# Altium PCB nogyr.PcbDoc
Units mil, origin at the board's own origin, x right, y up, seen from the top; angles counter-clockwise.
Board outline 2449.82 x 1510.05 mil, 2 copper layers (Top Layer, Bottom Layer); 30 components, 62 nets, 140 pads, 42 vias.
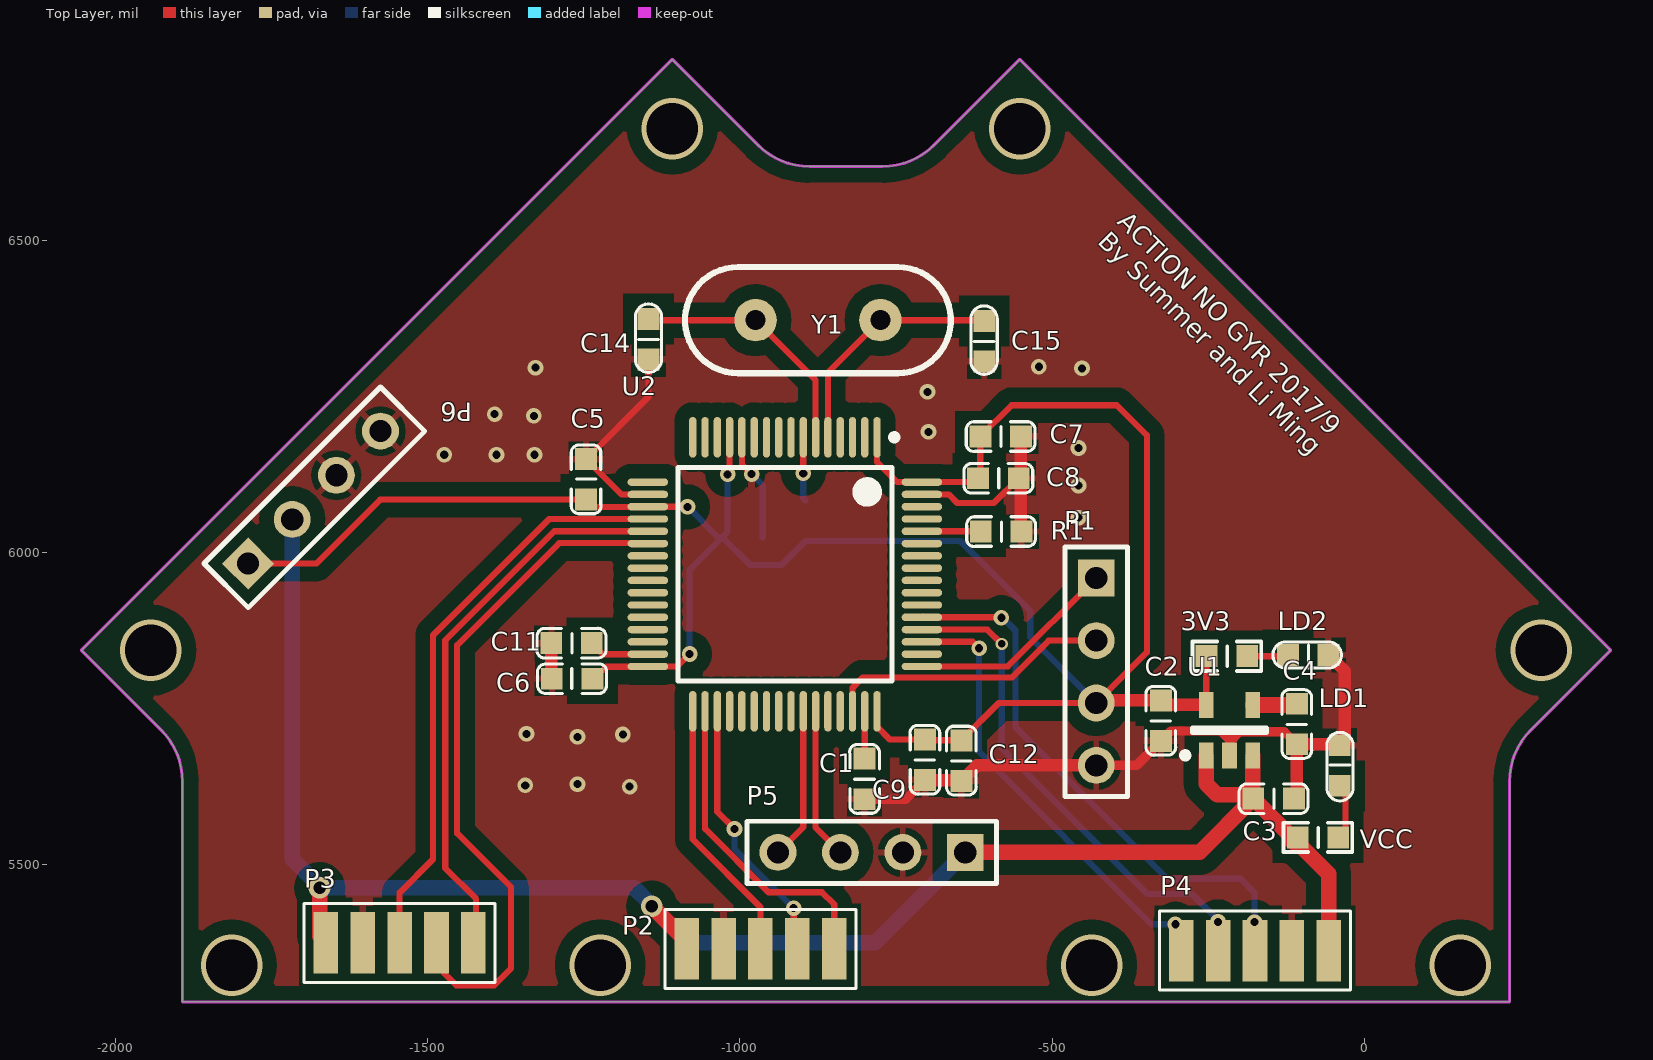
[diagram p0: Top Layer view]
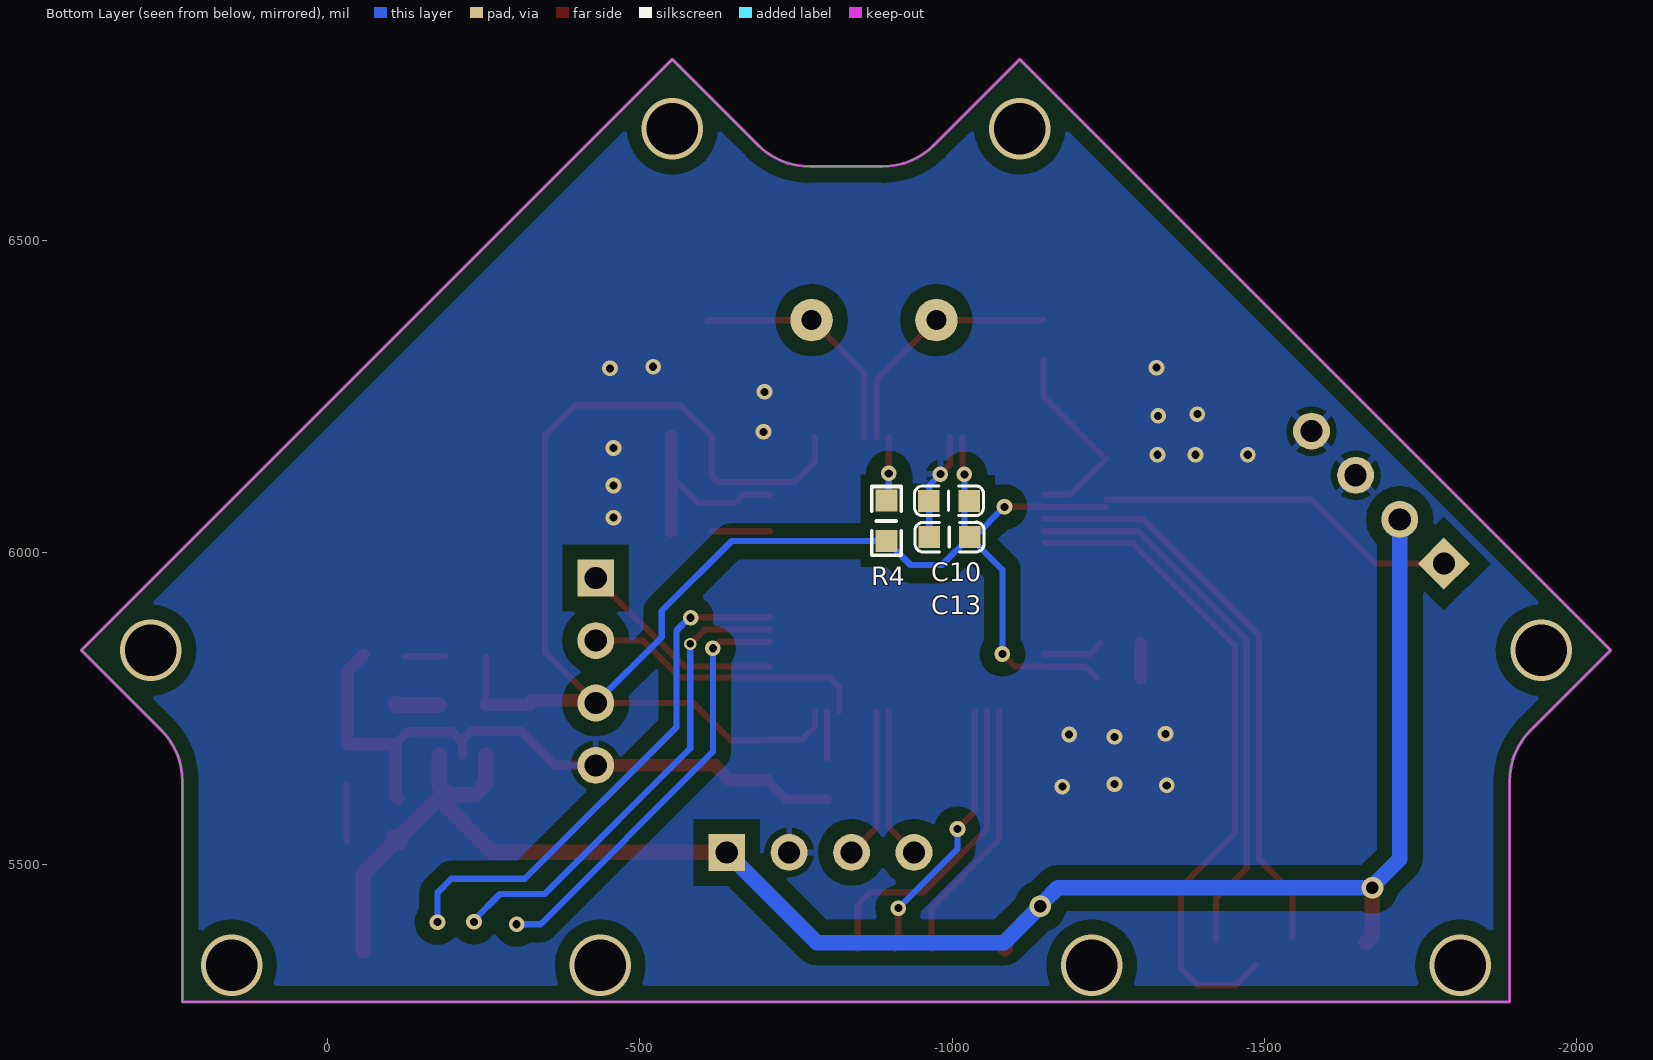
[diagram p1: Bottom Layer view, seen from below]
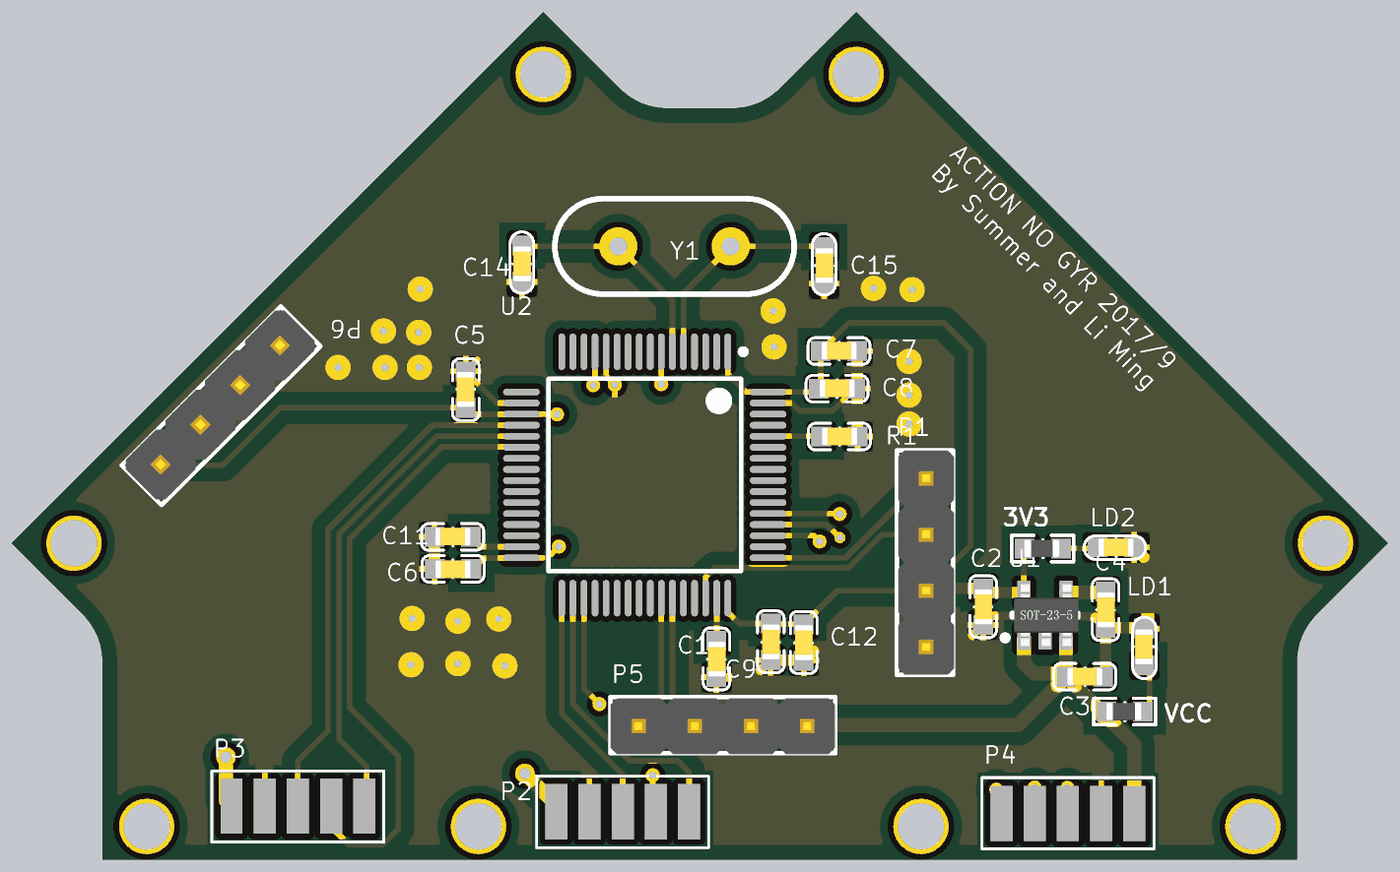
[diagram p2: 3D render of the assembled board from above, using the file's embedded part models]
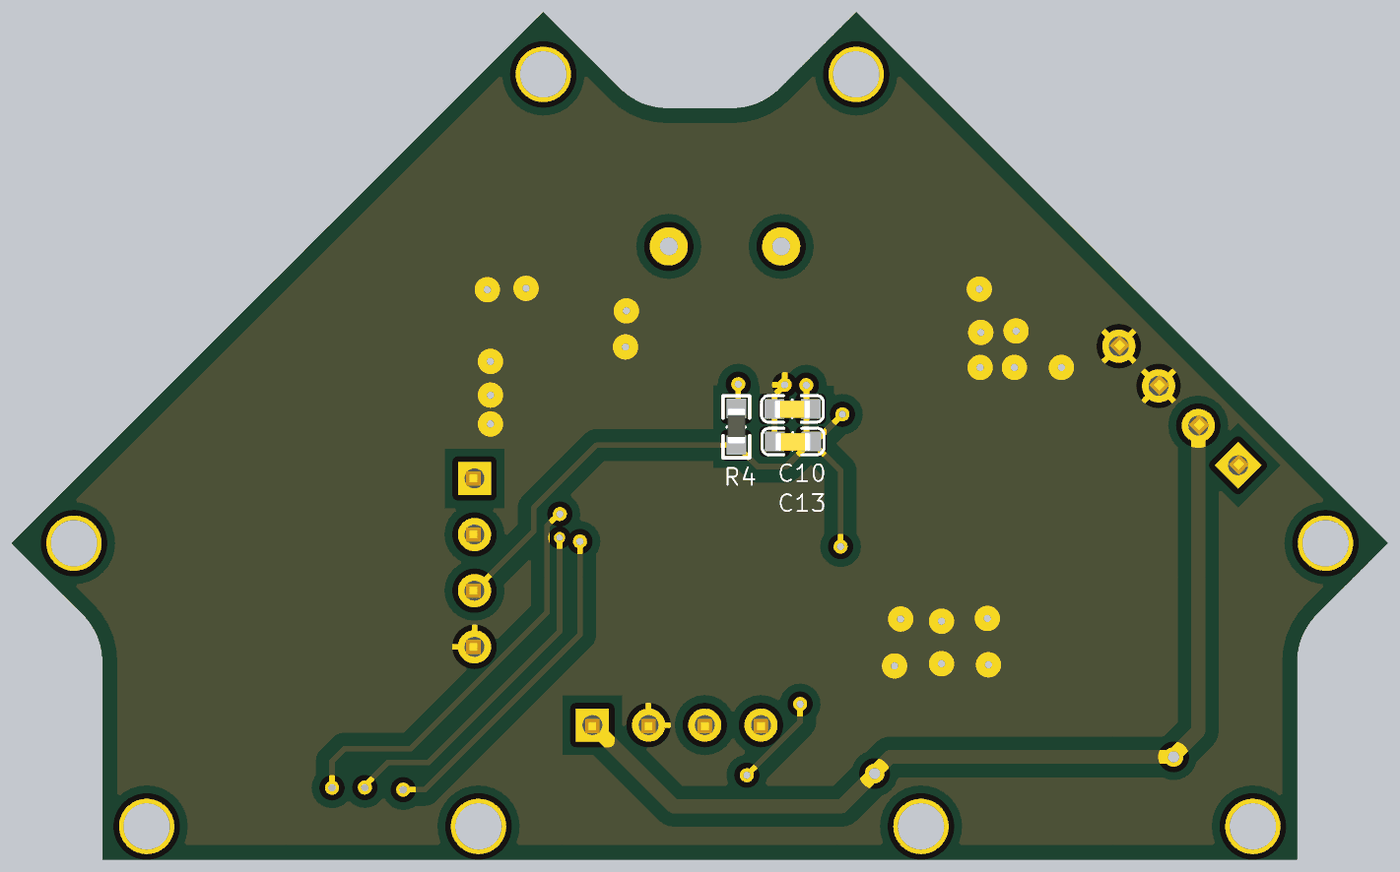
[diagram p3: 3D render of the assembled board from below, using the file's embedded part models]

## Layer stack, top to bottom
Top Solder: solder mask 0.4, Solder Resist, Dk 3.5
Top Layer: signal copper 1.4
Dielectric1: dielectric 12.6, FR-4, Dk 4.8
Bottom Layer: signal copper 1.4
Bottom Solder: solder mask 0.4, Solder Resist, Dk 3.5

## Board outline
-1893.04,5633.08 ccw(c-2011.15,5633.08) -1927.64,5716.6 -2054.96,5843.92 -1108.44,6790.44 -971.56,6653.57 ccw(c-888.05,6737.08) -888.05,6618.97 -772.06,6618.97 ccw(c-772.06,6737.08) -688.54,6653.57 -551.66,6790.44 394.86,5843.92 267.53,5716.6 ccw(c351.05,5633.08) 232.94,5633.08 232.94,5280.39 -1893.04,5280.39

## Design rules (kind name [scope] priority, off if disabled: settings)
Clearance [All] p1: gap=7 ignorepadtopadclearanceinfootprint=FALSE
PlaneClearance [All] p1: clearance=24
PolygonConnect [All] p1: connectstyle=Relief reliefconductorwidth=10 reliefentries=4 polygonreliefangle="90 Angle" airgapwidth=10
RoutingVias [All] p1: holewidth=28 width=50 viastyle="Through Hole" minholewidth=28 minwidth=50 maxholewidth=28 maxwidth=50
SilkToSilkClearance [All] p1: silktosilkclearance=0
SilkToSolderMaskClearance SilkscreenOverComponentPads [IsPad] p1: minsilkscreentomaskgap=0 clearancetoexposedcopper=TRUE
SolderMaskExpansion [All] p1: expansion=10
Width [All] p1: maxlimit=60 minlimit=10 preferedwidth=10
27 further rules are at their usual default settings.

## Components (designator, comment, footprint, x,y, rotation, side; value= is the part's Value field where it differs from the comment)
3V3 "471" R-0603R -277.24,5859.42 r0 top (schematic designator R3)
C1 "2.2uF" C-0603C -772.9,5695.52 r270 top
C2 "105" C-0603C -298.19,5788.68 r270 top
C3 "105" C-0603C -202.74,5633.54 r0 top
C4 "105" C-0603C -80.32,5783.41 r270 top
C5 "104" C-0603C -1273.92,6059.99 r90 top
C6 "104" C-0603C -1211.22,5770.82 r180 top
C7 "104" C-0603C -640.06,6213.81 r0 top
C8 "104" C-0603C -643.63,6146.94 r0 top
C9 "104" C-0603C -676.17,5726.13 r270 top
C10 "105" C-0603C -1052.74,6055.83 r0 bottom
C11 "2.2uf" C-0603C -1327.52,5882.74 r0 top
C12 "106" C-0603C -617.74,5724.8 r270 top
C13 "104" C-0603C -1053.61,5997.7 r0 bottom
C14 "22P" 0603C -1145.88,6373.77 r270 top
C15 "22P" 0603C -608.22,6370.72 r270 top
LD1 "LED" 0603C -39.32,5627.59 r90 top
LD2 "LED" 0603C -121.25,5836.81 r0 top
P1 "下载口" HDR1X4 -429.17,5959.41 r270 top
P2 "Header 5" FPC5-1.0 -1085.29,5365.74 r0 top
P3 "Header 5" FPC5-1.0 -1663.28,5375.46 r0 top
P4 "Header 5" FPC5-1.0 -56.74,5362.31 r180 top
P5 "4针排针" HDR1X4 -638.98,5519.99 r180 top
P6 "4针排针" HDR1X4 -1787.97,5982.8 r45 top (schematic designator P5)
R1 "102" C-0603C -639.28,6061.45 r0 top
R4 "102" R-0603R -920.11,6108.77 r270 bottom
U1 "LDO-3.0V" SOT-235 -215.66,5715.85 r90 top
U2 "MCU" LQFP64-STM32F405RG -927.93,5965.6 r270 top
VCC "102" R-0603R -131.41,5569.11 r0 top (schematic designator R2)
Y1 "8M" 晶振-crystals -877.32,6376.68 r180 top

## Footprints (in the part's own frame and the unit in brackets; to place one, negate y for a bottom-side part, rotate by r counter-clockwise, add the part's x,y. Pads: shape width x height; smd on the part's side, far side on the other; paste and mask are expansions set on the pad)
0603C [mil]
  rect 35x35 smd: 1(-0.77,-0.4) 2(64.23,-0.4)
  silkscreen extent -25,-22 85,20, body extent -23,-24 87,23, height 10
C-0603C [mil]
  rect 35x35 smd: 1(25.23,-27.4) 2(90.23,-27.4)
  silkscreen extent 3,-51 113,-4, body extent 3,-51 113,-4, height 10
FPC5-1.0 [mm]
  rect 1x2.5 smd: 1(0,0) 2(1.5,0) 3(3,0) 4(4.5,0) 5(6,0)
  silkscreen extent -0.89,-1.63 6.88,1.6
HDR1X4 [mm] "Connector; Header; 4 Position"
  rect 1.5x1.5 hole 0.9: 1(0,0)
  round 1.5 hole 0.9: 2(2.54,0) 3(5.08,0) 4(7.62,0)
  silkscreen extent -1.27,-1.27 8.89,1.27, body extent -1.27,-1.22 8.89,1.32, height 10.1
LQFP64-STM32F405RG [mm] "TSQFP, 64-Leads, Body 12.0x12.0mm (max), Pitch 0.50mm, IPC Medium Density"
  oval 1.65x0.3 smd: 1(-5.575,3.75) 2(-5.575,3.25) 3(-5.575,2.75) 4(-5.575,2.25) 5(-5.575,1.75) 6(-5.575,1.25) 7(-5.575,0.75) 8(-5.575,0.25) 9(-5.575,-0.25) 10(-5.575,-0.75) 11(-5.575,-1.25) 12(-5.575,-1.75) 13(-5.575,-2.25) 14(-5.575,-2.75) 15(-5.575,-3.25) 16(-5.575,-3.75) 33(5.575,-3.75) 34(5.575,-3.25) 35(5.575,-2.75) 36(5.575,-2.25) 37(5.575,-1.75) 38(5.575,-1.25) 39(5.575,-0.75) 40(5.575,-0.25) 41(5.575,0.25) 42(5.575,0.75) 43(5.575,1.25) 44(5.575,1.75) 45(5.575,2.25) 46(5.575,2.75) 47(5.575,3.25) 48(5.575,3.75)
  oval 0.3x1.65 smd: 17(-3.75,-5.575) 18(-3.25,-5.575) 19(-2.75,-5.575) 20(-2.25,-5.575) 21(-1.75,-5.575) 22(-1.25,-5.575) 23(-0.75,-5.575) 24(-0.25,-5.575) 25(0.25,-5.575) 26(0.75,-5.575) 27(1.25,-5.575) 28(1.75,-5.575) 29(2.25,-5.575) 30(2.75,-5.575) 31(3.25,-5.575) 32(3.75,-5.575) 49(3.75,5.575) 50(3.25,5.575) 51(2.75,5.575) 52(2.25,5.575) 53(1.75,5.575) 54(1.25,5.575) 55(0.75,5.575) 56(0.25,5.575) 57(-0.25,5.575) 58(-0.75,5.575) 59(-1.25,5.575) 60(-1.75,5.575) 61(-2.25,5.575) 62(-2.75,5.575) 63(-3.25,5.575) 64(-3.75,5.575)
  silkscreen extent -5.7,-4.35 4.35,4.58, body extent -5,-5 5,5, height 1.6
R-0603R [mil]
  rect 35x35 smd: 1(25,-25) 2(90,-25)
  silkscreen extent 2,-49 113,-1, body extent 25,-40 87,-9, height 15
SOT-235 [mm] "SOT23, 5-Leads, Body 3.0x2.6mm (max), Pitch 0.95mm, IPC Medium Density"
  rect 1.05x0.6 smd: 1(-1.025,0.95) 2(-1.025,0) 3(-1.025,-0.95) 4(1.025,-0.95) 5(1.025,0.95)
  silkscreen extent -1.15,-1.5 0.1,1.92, body extent -1.4,-1.5 1.4,1.4, height 1.2
晶振-crystals [mil]
  round 68 hole 32: 1(-102.36,3.94) 2(97.64,3.94)
  silkscreen extent -215,-81 210,89, body extent -235,-75 237,83, height 118

## Part data
3V3 R4 VCC: library part "Res Semi", "Semiconductor Resistor"
C1 C5 C6 C7 C8 C9 C10 C11 C12 C13 C14 C15: library part Cap, "Capacitor"
C2 C3 C4: library part CAP, "Capacitor"
P1 P5 P6: library part "Header 4", "Header, 4-Pin"
P2 P3 P4: "Header, 5-Pin"
R1: library part Res2, "Resistor"
U1: library part TPS73230MDBVREP, "TPS73230MDBVREP"
U2: library part STM32F405RGT7
Y1: library part XTAL, "Crystal Oscillator"

## Via types
v1: diameter 25, hole 13, Top Layer to Bottom Layer, 31 vias
v2: diameter 98.43, hole 82.68, Top Layer to Bottom Layer, 8 vias
v3: diameter 35, hole 20, Top Layer to Bottom Layer, 2 vias
v4: diameter 20, hole 12, Top Layer to Bottom Layer, 1 vias

## Nets (pads, with @x,y where several pads share a name; then routed paths per layer and width w, separated by ;. In a path a pad name is that pad's centre, name@x,y a point inside that pad or via, vN(x,y) a via of type N, cw(c..) or ccw(c..) an arc to the next point about the centre after c; other vN are vias at no path point)
3V: 3V3.1 C2.1 C5.1 C6.1 C7.1 C8.1 C9.1 C10.1 C12.1 C13.1 P1.3 P6.1 R4.2 U1.5 U2.1 U2.13 U2.19 U2.32 U2.48 U2.64 | length 3842.6
  Top Layer w10: P6.1 -1678.93,5982.8 -1576.52,6085.21 C5.1 ; C5.1@-1245.85,6073.49 U2.19@-1143.51,6073.49 ; C6.1@-1231.41,5800.3 -1214.27,5817.44 -1147.93,5817.44 U2.32 -1100.66,5817.96 v1(-1080.67,5837.94) ; U2.19 -1084.13,6073.87 v1(-1083.91,6073.65) ; v1@-1016.51,6128.76 U2.13 ; U2.48 -780.29,5721.42 -759.77,5700.91 C9.1 ; U2.1 -780.29,6145.32 -748.2,6113.24 U2.64 -624.71,6113.24 C8.1 -614.83,6123.11 C7.1 -564.72,6236.53 -396.35,6236.53 -348.03,6188.21 -348.03,5840.55 -425.13,5763.45 P1.3 -585.3,5759.41 C12.1 C9.1@-702.23,5699.57 ; C2.1@-326.27,5759.46 C2.1@-323.01,5756.21 ; U1.5 3V3.1@-253.06,5833.61
  Top Layer w20: P1.3@-425.13,5763.45 C2.1 ; C2.1@-323.01,5756.21 U1.5
  Bottom Layer w10: v1(-1083.91,6073.65) -1035.34,6025.1 C13.1 ; v1@-1081.36,5837.25 -1080.66,5837.95 -1080.66,5972.82 C13.1 ; v1(-1019.7,6125.57) -1019.7,6033.78 C13.1 ; P1.3 -534.75,5864.99 -534.75,5906.88 -646.64,6018.77 R4.2 -933.42,5980.46 -983.74,5980.46 C13.1
GND: C1.2 C2.2 C3.2 C4.2 C5.2 C6.2 C7.2 C8.2 C9.2 C10.2 C11.1 C12.2 C13.2 C14.2 C15.2 LD1.2 LD2.2 P1.4 P2.2 P3.2 P4.2 P5.2 P6.3 P6.4 R1.2 U1.2 U2.12 U2.18 U2.63 | length 1988.1
  Top Layer w10: U2.18 -1189.86,6093.55 C5.2 -1146.27,6250.46 C14.2 ; U2.12 -996.82,6141.7 v1(-981.27,6126.14) ; U2.63 -665.74,6093.55 -652.01,6079.82 -593.12,6079.82 C8.2 ; R1.2@-549.83,6034.83 R1.2
  Top Layer w15: C1.2 -734.18,5605.29 C9.2 ; P1.4 -364.63,5659.41 C2.2 -309.44,5714.6 -229.75,5714.6 -215.66,5700.5 -215.66,5696.9 ; U1.2 -215.66,5696.9 ; C4.2 -127.87,5713.34 -199.21,5713.34 -215.66,5696.9
  Top Layer w20: C6.2@-1302.29,5799.07 C11.1 ; C9.2 -646.48,5635.91 C12.2 -620.3,5659.41 P1.4 ; R1.2@-549.83,6034.83 C7.2 ; C3.2 -107.72,5610.94 C4.2 -31.03,5693.19 -31.03,5810.41 LD2.2
  Bottom Layer w10: v1(-981.27,6126.14) -963.38,6108.26 C13.2
  other v1: -1176.75,5625.42 -1343.84,5627.39 -1260.29,5629.36 -1260.29,5705.04 -1187.56,5708.97 -1341.88,5709.94 -457.59,6056.4 -457.59,6107.85 -1473.63,6157.12 -1389.96,6157.12 -1329.05,6157.11 -457.59,6167.86 -697.89,6193.69 -1330.14,6219.47 -1392.94,6222.09 -699.53,6257.85 -452.01,6295.58 -1327.53,6296.66 -520.97,6298.02
NetC1_1: C1.1 U2.47 | length 75.5
  Top Layer w10: C1.1@-799.97,5670.61 U2.47
NetC4_1: C4.1 U1.4 | length 71.4
  Top Layer w25: U1.4 -109.7,5756.21 C4.1
NetC11_2: C11.2 U2.31 | length 97.2
  Top Layer w10: C11.2 -1219.6,5837.65 U2.31
NetLD1_A: LD1.1 VCC.2 | length 92
  Top Layer w10: VCC.2@-29.9,5537.29 LD1.1@-29.9,5629.32
NetLD2_A: 3V3.2 LD2.1 | length 63.2
  Top Layer w10: 3V3.2 LD2.1@-124.01,5834.42
NetR1_1: R1.1 U2.60 | length 93.9
  Top Layer w10: U2.60 R1.1@-614.5,6034.5
NetR4_1: R4.1 U2.7 | length 102.6
  Top Layer w10: v1@-898.4,6127.48 U2.7
  Bottom Layer w10: v1(-898.61,6127.26) -898.61,6087.27 R4.1
OSC_IN: C15.1 U2.5 Y1.1 | length 389.3
  Top Layer w10: U2.5 -859.03,6288.68 Y1.1 -609.86,6372.74 C15.1
OSC_OUT: C14.1 U2.6 Y1.2 | length 399.6
  Top Layer w10: C14.1 -1144.47,6372.74 Y1.2 -878.71,6276.49 U2.6
PA0: U2.14
PA1: U2.15
PA2: U2.16
PA3: U2.17
PA4: P3.3 U2.20 | length 928
  Top Layer w10: P3.3@-1545.2,5383.73 -1545.2,5455.39 -1491.67,5508.92 -1491.67,5868.22 -1305.71,6054.18 U2.20
PA5: P3.5 U2.21 | length 897.4
  Top Layer w10: P3.5@-1422.67,5379.9 -1422.67,5445.54 -1471.98,5494.85 -1471.98,5860.07 -1297.55,6034.5 U2.21
PA6: P3.4 U2.22 | length 1069.7
  Top Layer w10: P3.4@-1486.4,5339.09 -1454.51,5307.2 -1393.74,5307.2 -1366.67,5334.27 -1366.67,5464.26 -1453.09,5550.67 -1453.09,5852.24 -1289.73,6015.6 U2.22@-1149.02,6015.6
PA7: U2.23
PA8: U2.41
PA9: P5.4 U2.42 | length 242.9
  Top Layer w10: P5.4 -898.4,5560.56 U2.42
PA10: P5.3 U2.43 | length 242.6
  Top Layer w10: U2.43 -878.71,5559.72 P5.3
PA11: U2.44
PA12: U2.45
PA13: P1.2 U2.46 | length 459.7
  Top Layer w10: U2.46 -819.66,5784.11 -803.71,5800.06 -564.48,5800.06 -505.13,5859.41 P1.2
PA14: P1.1 U2.49 | length 337.9
  Top Layer w10: U2.49 -570.62,5817.96 P1.1
PA15: U2.50
PB0: U2.26
PB1: U2.27
PB2: U2.28
PB3: U2.55
PB4: U2.56
PB5: U2.57
PB6: U2.58
PB7: U2.59
PB8: U2.61
PB9: U2.62
PB10: U2.29
PB11: U2.30
PB12: P2.3 U2.33 | length 425.3
  Top Layer w10: U2.33 -1075.56,5540.91 -967.18,5432.52 P2.3
PB13: P2.5 U2.34 | length 516.2
  Top Layer w10: U2.34 -1055.88,5558.05 -954.18,5456.35 -868.56,5456.35 -849.07,5436.86 P2.5
PB14: P2.4 U2.35 | length 433.4
  Top Layer w10: U2.35 -1036.19,5585.14 v1(-1008.61,5557.53) ; v1(-913.88,5430.68) -913.88,5371.5 P2.4
  Bottom Layer w10: v1(-1008.61,5557.53) -1008.61,5525.43 v1(-913.88,5430.68)
PB15: U2.36
PC0: U2.8
PC1: U2.9
PC2: U2.10
PC3: U2.11
PC4: U2.24
PC5: U2.25
PC6: U2.37
PC7: U2.38
PC8: U2.39
PC9: U2.40
PC10: P4.5 U2.51 | length 690.8
  Top Layer w10: U2.51 -627.06,5857.33 v1(-616.81,5847.08)
  Bottom Layer w10: v1(-616.81,5847.08) -616.81,5681.06 -340.72,5404.96 v1(-302.31,5404.96)
PC11: P4.4 U2.52 | length 765.7
  Top Layer w10: U2.52 -603.64,5877.02 v4(-580.54,5853.92)
  Bottom Layer w10: v4(-580.54,5853.92) -580.54,5686.69 -347.22,5453.37 -275.75,5453.37 v1@-233.59,5411.21
  other v1: -234.04,5408.75
PC12: P4.3 U2.53 | length 851.9
  Top Layer w10: U2.53@-707.2,5897.94 U2.53 v1@-581.77,5896.7
  Bottom Layer w10: v1@-578.68,5895.7 -558.54,5875.56 -558.54,5720.57 -315.67,5477.7 -197.67,5477.7 -175.59,5455.62 v1(-175.6,5408.29)
  other v1: -581.06,5895.99
PC13: U2.2
PC14: U2.3
PC15: U2.4
PD2: U2.54
VCC: C3.1 P2.1 P3.1 P4.1 P5.1 P6.2 U1.1 U1.3 VCC.1 | length 2894.4
  Top Layer w25: v3(-1673.31,5463.3) -1673.31,5385.49 P3.1 ; v3(-1141.26,5433.65) -1085.29,5377.68 P2.1 ; P5.1 -263.67,5519.99 C3.1 -110.95,5539.57 -56.74,5485.37 P4.1 ; U1.1 -253.06,5629.94 -235.25,5612.13 C3.1@-192.52,5612.13 ; C3.1@-188.01,5616.64 -178.26,5626.39 U1.3 ; VCC.1@-114.26,5536.27 VCC.1
  Bottom Layer w25: P6.2 -1717.26,5509.54 v3@-1671.02,5463.3 ; v3(-1673.31,5463.3) v3@-1671.02,5463.3 ; v3@-1145.91,5439.88 -1169.33,5463.3 v3@-1671.02,5463.3 ; v3(-1141.26,5433.65) -1082.97,5375.37 -783.59,5375.37 P5.1
VCC_IN: 
copper on no net:
  other v2: -1814.3,5339.44 -1223.75,5339.44 -436.35,5339.44 154.2,5339.44 -1943.61,5843.92 283.5,5843.92 -1108.44,6679.09 -551.66,6679.09

## Polygon pours and split planes (outlines as drawn)
GND on Top Layer "Top Layer-No Net" (solid, remove dead copper, pour order 0): -893.17,7195.49 -2666.83,5421.82 -2666.83,5171.38 1093.97,5171.38 1151.45,5228.86 -819.28,7199.58 -889.07,7199.58
GND on Bottom Layer "Top Layer-No Net" (solid, remove dead copper, pour order 4): -856.24,7150.28 -2810.53,5195.99 1085.74,5195.99 -843.92,7125.65 -843.92,7154.39

## Keep-outs
Keep-Out Layer:
  lines w5: -2054.96,5843.92 -1927.64,5716.6 cw(c-2011.15,5633.08) -1893.04,5633.08 -1893.04,5280.39 -830.05,5280.39 232.94,5280.39 232.94,5633.08 cw(c351.05,5633.08) 267.53,5716.6 394.86,5843.92 -551.66,6790.44 -688.54,6653.57 cw(c-772.06,6737.08) -772.06,6618.97 -888.05,6618.97 cw(c-888.05,6737.08) -971.56,6653.57 -1108.44,6790.44 -2054.96,5843.92

## Silkscreen, mask and mechanical layers (free items; w line width, h text height)
Top Overlay:
  text "ACTION NO GYR 2017/9   / By Summer and Li Ming" at -428.54,6496.89 h30 r315
Bottom Overlay:
  drawing of 279 lines, arcs and shapes, not listed